# EAGLE board Smart Home (EAGLE 9.7.0)

Size 277.59 x 112.45 mm. Coordinates in mm from the lower left corner, seen from the top.
Outline: 0,0 277.59,0 277.59,112.45 0,112.45 0,0
Copper layers (1*16): Top 0.035mm / dielectric 1.5mm / Bottom 0.035mm
Design rules "default": minimum track width 6mil, minimum drill 0.35mm, track to track 6mil, track to pad 6mil, pad to pad 6mil, via to via 6mil, smd to smd 6mil, copper to edge 40mil, drill to drill 6mil, minimum pad ring 10mil, minimum via ring 8mil, stop-mask expansion 4mil, vias tented up to drill 0mil, thermal gap 10mil

## Footprints (pad centres in the part's own frame; a part is rotated, then mirrored left to right if it is on the bottom)
HC-SR04 = drill 1.016 long: 1 -3.81,0; 2 -1.27,0; 3 1.27,0; 4 3.81,0
MQ-XX-SOCKET = drill 1.27: 1 -6.223,6.223; 2 -8.788,0; 3 -6.223,-6.223; 4 6.223,-6.223; 5 8.788,0; 6 6.223,6.223
LU-5-R = drill 0.8: 1 -6.35,-3.81; 5 3.81,-3.81; 6 6.35,-3.81; 7 6.35,3.81; 8 3.81,3.81; 12 -6.35,3.81
1X02 = drill 1.016 long: 1 -1.27,0; 2 1.27,0
MOTOR = drill 1.118 pad 3.15 octagon: + 2.54,0; - -2.54,0
BATTERY-GENERIC = drill 1.118 pad 3.15 octagon: + 2.54,0; - -2.54,0
28027 = drill 1.016 long: 1 -2.54,0; 2 0,0; 3 2.54,0
RESAD1016W63L850D250B = drill 0.83 pad 1.43: 1 -5.08,0; 2 5.08,0
GL5528 = drill 0.8 pad 1.4: 1 -1.702,0; 2 1.702,0
SWITCH-SPDT-PTH-8.5X3.7MM = drill 1.016 pad 1.88: 1 -2.54,0; 2 0,0; 3 2.54,0
ARDUINO-UNO-R3-SHIELD = drill 1.016 pad 1.88: 3.3V 24.13,-2.54; 5V 24.13,0; A0 24.13,12.7; A1 24.13,15.24; A2 24.13,17.78; A3 24.13,20.32; A4 24.13,22.86; A5 24.13,25.4; AREF -24.13,-13.97; D2 -24.13,20.32; D3 -24.13,17.78; D4 -24.13,15.24; D5 -24.13,12.7; D6 -24.13,10.16; D7 -24.13,7.62; D8 -24.13,3.81; D9 -24.13,1.27; D10 -24.13,-1.27; D11 -24.13,-3.81; D12 -24.13,-6.35; D13 -24.13,-8.89; GND@0 24.13,2.54; GND@1 24.13,5.08; GND@2 -24.13,-11.43; IOREF 24.13,-7.62; NC 24.13,-10.16; RES 24.13,-5.08; RX -24.13,25.4; SCL -24.13,-19.05; SDA -24.13,-16.51; TX -24.13,22.86; VIN 24.13,7.62
JHD-162A = drill 1.016 long: 1 -19.05,0; 2 -16.51,0; 3 -13.97,0; 4 -11.43,0; 5 -8.89,0; 6 -6.35,0; 7 -3.81,0; 8 -1.27,0; 9 1.27,0; 10 3.81,0; 11 6.35,0; 12 8.89,0; 13 11.43,0; 14 13.97,0; 15 16.51,0; 16 19.05,0

## Placement (x,y rotation side)
DIST1  DISTANCE-SENSOR-4PINHC-SR04  [HC-SR04]  137.13,22.23 0 top
GAS1  GAS-SENSORMQ-XX-SOCKET  [MQ-XX-SOCKET]  220.43,42.68 270 top
K1  RELAY-SPDT_LU-5-R  [LU-5-R]  219.25,84.61 180 top
L1  LIGHTBULB  [1X02]  233.4,98.42 0 top
M1  MOTOR_HDR  [MOTOR]  269.34,101.63 0 top
P1  BATTERYGENERIC  [BATTERY-GENERIC]  266.86,61.84 180 top
PIR1  PIR-SENSOR_28027  [28027]  179.52,35.07 0 top
R1  1k  [RESAD1016W63L850D250B]  124.8,89.23 90 top
R2  220  [RESAD1016W63L850D250B]  155.28,89.23 90 top
R3  1k  [RESAD1016W63L850D250B]  215.35,59.19 90 top
R4  PHOTOCELL_GL5528  [GL5528]  90.21,39.04 0 top
R5  1k  [RESAD1016W63L850D250B]  91.46,29.17 90 top
S1  TOGGLE  [SWITCH-SPDT-PTH-8.5X3.7MM]  247.14,105.47 0 top
U1  ARDUINO-UNO-R3-SHIELD  [ARDUINO-UNO-R3-SHIELD]  47.88,44.92 270 top
U2  LCD-16X2JHD-162A  [JHD-162A]  138.77,84.28 0 top

## Library data of the parts
DIST1 GAS1 K1 L1 M1 P1 PIR1 R1-R5 S1 U1 U2 = Tinkercad

## Nets
M1_+: K1.6 L1.1 M1.+
M1_-: M1.- S1.2
P1+: K1.12 P1.+
P1-: L1.2 P1.- S1.1
U1_5V: DIST1.1 GAS1.4 GAS1.5 GAS1.6 PIR1.2 R2.2 R4.1 U1.5V U2.2
U1_A0: R5.1 U1.A0
U1_A1: GAS1.1 GAS1.3 R3.1 U1.A1
U1_D2: U1.D2 U2.14
U1_D3: U1.D3 U2.13
U1_D4: U1.D4 U2.12
U1_D5: U1.D5 U2.11
U1_D6: DIST1.3 U1.D6
U1_D7: DIST1.2 U1.D7
U1_D8: PIR1.1 U1.D8
U1_D11: U1.D11 U2.6
U1_D12: U1.D12 U2.4
U1_D13: K1.5 U1.D13
U1_GND: DIST1.4 GAS1.2 K1.8 PIR1.3 R1.2 R3.2 R4.2 R5.2 U1.GND@0 U1.GND@1 U1.GND@2 U2.1 U2.5 U2.16
U2_LED+: R2.1 U2.15
U2_VO: R1.1 U2.3

## Tracks (layer width: path | path; a pad name or v marks a point on that pad's centre or on a via)
M1_+  (2 unrouted)
M1_-  (1 unrouted)
P1+  (1 unrouted)
P1-  (2 unrouted)
U1_5V  (8 unrouted)
U1_A0  (1 unrouted)
U1_A1  (3 unrouted)
U1_D2  (1 unrouted)
U1_D3  (1 unrouted)
U1_D4  (1 unrouted)
U1_D5  (1 unrouted)
U1_D6  (1 unrouted)
U1_D7  (1 unrouted)
U1_D8  (1 unrouted)
U1_D11  (1 unrouted)
U1_D12  (1 unrouted)
U1_D13  (1 unrouted)
U1_GND  (13 unrouted)
U2_LED+  (1 unrouted)
U2_VO  (1 unrouted)